# Altium PCB ADCS_BOARDV2.PcbDoc (part 2 of 2)
Units mm, origin at the board's own origin, x right, y up, seen from the top; angles counter-clockwise.
Board outline 92.58 x 92.46 mm, 2 copper layers (Top Layer, Bottom Layer); 139 components, 123 nets, 589 pads, 179 vias.
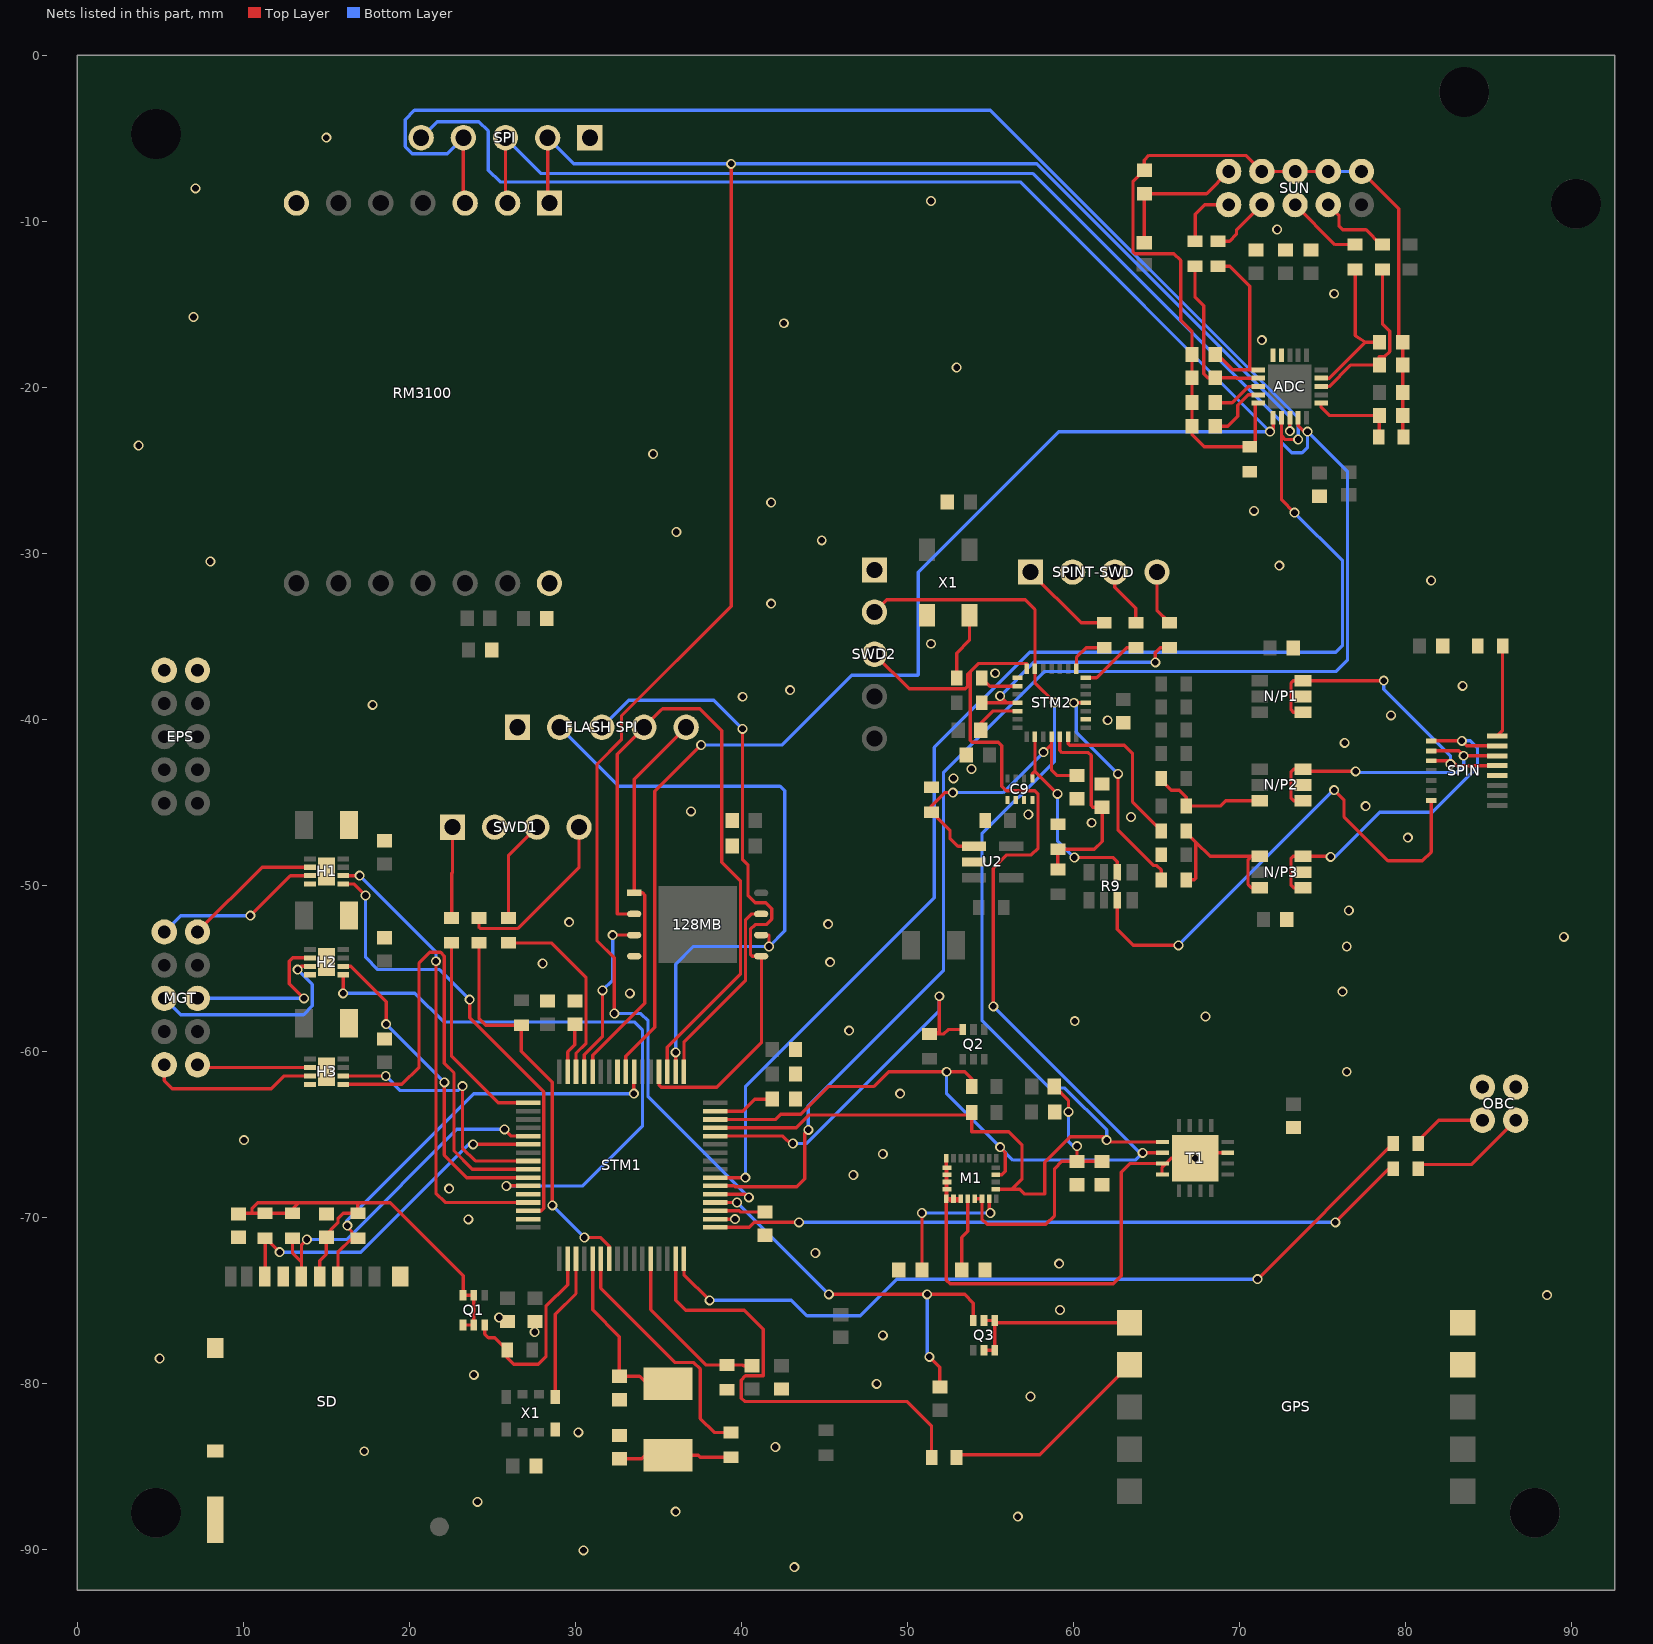
[diagram p2: the nets of this part, all layers, seen from the top]

## Via types
v1: diameter 0.6, hole 0.4, Top Layer to Bottom Layer, 179 vias

## Nets (pads, with @x,y where several pads share a name; then routed paths per layer and width w, separated by ;. In a path a pad name is that pad's centre, name@x,y a point inside that pad or via, vN(x,y) a via of type N, cw(c..) or ccw(c..) an arc to the next point about the centre after c; other vN are vias at no path point) (continued)
BU_R: N/P2.3 R20.1 R21.2 | length 7.1
  Top Layer w0.2: R20.1@65.29,-43.561 65.29,-43.661 65.891,-44.262 66.377,-44.262 66.79,-44.675 R21.2@66.79,-45.212 68.834,-45.212 69.154,-44.892 N/P2.3@71.217,-44.892
C1_SENS: C29.2 M1.24 | length 8.4
  Top Layer w0.2: C29.2@50.865,-73.152 v1(50.865,-69.723) ; M1.24@54.913,-68.861 54.913,-69.645 v1(54.991,-69.723)
  Bottom Layer w0.2: v1(50.865,-69.723) v1(54.991,-69.723)
C7: 
C12: C12.1 STM1.47 | length 3
  Top Layer w0.2: STM1.47@29.528,-61.214 29.528,-60.02 29.96,-59.588 C12.1@29.96,-58.358
C13: C13.2 STM1.19 | length 3
  Top Layer w0.2: STM1.19@38.404,-69.59 39.853,-69.59 39.925,-69.663 C13.2@41.402,-69.663
C16: C16.1 STM1.31 | length 3.7
  Top Layer w0.2: STM1.31@38.404,-63.59 40.067,-63.59 40.792,-62.865 C16.1@41.845,-62.865
C17: 
C23: C23.2 STM1.5 X2.2 | length 10.9
  Top Layer w0.2: STM1.5@31.028,-72.466 31.028,-75.554 32.639,-77.165 C23.2@32.639,-79.564 33.858,-79.564 34.313,-80.019 X2.2@35.56,-80.019
C24: C24.1 R1.1 X2.1 | length 6.9
  Top Layer w0.2: C24.1@32.639,-84.52 33.985,-84.52 34.186,-84.319 X2.1@35.56,-84.319 37.389,-84.319 37.513,-84.443 R1.1@39.37,-84.443
CAP_SENS_21: C30.1 M1.21 | length 4.4
  Top Layer w0.2: C30.1@53.262,-73.152 53.262,-71.196 53.623,-70.835 M1.21@53.623,-68.861
CD: R25.1 STM2.13 | length 9.9
  Top Layer w0.2: STM2.13@59.674,-41.044 59.674,-41.453 59.776,-41.554 63.043,-41.554 63.551,-42.062 63.551,-44.971 R25.1@65.29,-46.711
CD_R: N/P3.1 N/P3.3 R25.2 R27.2 | length 10.5
  Top Layer w0.2: R27.2@66.79,-49.657 67.259,-49.657 67.361,-49.555 67.361,-47.383 ; R25.2@66.79,-46.711 66.79,-46.812 67.361,-47.383 ; N/P3.3@71.217,-50.142 70.714,-50.142 70.51,-49.939 70.51,-48.445 70.714,-48.242 ; N/P3.1@71.217,-48.242 70.714,-48.242 ; 67.361,-47.383 68.22,-48.242 70.714,-48.242
CLKOUT: STM1.3 X1.4@28.78,-80.813 | length 8.9
  Top Layer w0.2: X1.4@28.78,-80.813 28.78,-75.822 30.028,-74.574 STM1.3@30.028,-72.466
Cm: C33.2 R33.1 STM2.11 U2.1 | length 16.5
  Top Layer w0.2: v1(52.73,-44.399) 52.248,-44.399 51.435,-45.212 R33.1@51.435,-45.581 51.462,-45.581 52.553,-46.672 52.553,-47.145 53.035,-47.628 U2.1@54,-47.628 ; v1(58.191,-41.961) 58.674,-41.478 ; STM2.11@58.674,-41.044 58.674,-41.478 ; C33.2@60.198,-43.369 58.979,-43.369 58.674,-43.064 58.674,-41.478
  Bottom Layer w0.2: v1(52.73,-44.399) 55.753,-44.399 v1(58.191,-41.961)
CNV: ADC.11 SPI.5 STM1.40 | length 128.8
  Top Layer w0.2: STM1.40@33.028,-61.214 33.028,-60.274 34.773,-58.53 34.773,-44.323 v1(37.567,-41.529) ; v1(71.831,-22.657) 72.025,-22.463 ADC.11@72.025,-21.831
  Bottom Layer w0.2: SPI.5@20.701,-4.953 21.666,-3.988 24.181,-3.988 24.74,-4.547 24.74,-6.909 25.451,-7.62 56.794,-7.62 v1(71.831,-22.657) 59.106,-22.657 50.648,-31.115 50.648,-37.313 50.622,-37.338 46.634,-37.338 42.443,-41.529 v1(37.567,-41.529)
Cp: C9.8@57.519,-43.546 R9.6 STM2.9 | length 12.1
  Top Layer w0.2: C9.8@57.519,-43.546 57.519,-43.275 57.674,-43.12 ; STM2.9@57.674,-41.044 57.674,-43.12 ; v1(59.03,-44.475) 57.674,-43.12 ; v1(60.046,-48.311) 62.382,-48.311 62.63,-48.558 R9.6@62.63,-49.193
  Bottom Layer w0.2: v1(59.03,-44.475) 59.03,-47.295 v1(60.046,-48.311)
Cp_RE: R9.3 SPIN.1 | length 30.6
  Top Layer w0.2: R9.3@62.63,-50.883 62.63,-52.629 63.602,-53.6 v1(66.319,-53.6) ; v1(75.692,-44.25) 76.293,-44.851 76.293,-45.872 78.934,-48.514 81.005,-48.514 81.539,-47.98 SPIN.1@81.539,-44.881
  Bottom Layer w0.2: v1(66.319,-53.6) v1@75.681,-44.239
CU: R27.1 STM2.18 | length 13.7
  Top Layer w0.2: v1(60.02,-38.989) STM2.18@60.729,-38.989 ; v1(62.672,-43.266) 62.672,-46.645 64.821,-48.793 65.024,-48.793 65.29,-49.059 R27.1@65.29,-49.657
  Bottom Layer w0.2: v1(60.02,-38.989) 60.16,-39.129 60.16,-40.754 v1(62.672,-43.266)
CU_R: R26.1
FM_nCE: 128MB.1 "FLASH SPI.5" STM1.44 | length 23.9
  Top Layer w0.2: STM1.44@31.028,-61.214 31.028,-60.223 34.163,-57.088 34.163,-50.569 34.036,-50.442 128MB.1@33.532,-50.442 33.528,-50.442 33.528,-43.603 36.665,-40.466
FM_nHLD: 128MB.7 STM1.33 | length 11.8
  Top Layer w0.2: STM1.33@36.528,-61.214 36.528,-59.439 40.233,-55.734 40.233,-52.096 40.617,-51.712 128MB.7@41.183,-51.712
FM_nWP: 128MB.3 STM1.45 | length 10.2
  Top Layer w0.2: STM1.45@30.528,-61.214 30.528,-60.198 31.623,-59.103 v1(31.623,-56.312) ; v1(32.233,-52.982) 128MB.3@33.532,-52.982
  Bottom Layer w0.2: v1(31.623,-56.312) 32.233,-55.702 v1(32.233,-52.982)
GND: 128MB.4 "FLASH SPI.1" ADC.4 ADC.5 C1.2 C2.2 C3.2 C4.2 C5.2 C6.2 C7.1 C9.8@56.019,-44.846 C9.8@56.519,-44.846 C9.8@57.019,-44.846 C9.8@57.519,-44.846 C10.1 C11.2 C12.2 C13.1 C14.1 C15.1 C16.2 C17.2 C18.2 C19.2 C20.2 C21.1 C22.1 C23.1 C24.2 C25.2 C26.1 C27.1 C28.1 C29.1 C30.2 C31.1 C32.2 C33.1 C34.1 C35.1 C36.2 C37.2 C39.2 C40.2 C42.2 C43.2 C44.1 C53.2 C54.2 EPS.1 EPS.2 GPS.2@83.439,-76.327 GPS.2@83.439,-78.867 H1.4 H1.9 H2.4 H2.9 H3.4 H3.9 N/P1.5 N/P2.5 N/P3.5 OBC.2 OBC.4 R3.1 R33.2 R35.2 R36.1 R45.1 R48.1 RM3100.1@28.428,-31.79 RM3100.7@13.188,-8.89 SD.6 SD.10 SD.11 SD.12 SD.13 SPI.1 SPIN.11 SPINT-SWD.2 STM1.18 STM1.60 STM1.63 STM2.1 STM2.16 SWD1.2 SWD2.1 U2.2 X1.2@51.176,-33.725 X1.8 | length 1.2
  Top Layer w0.2: STM1.18@38.404,-70.09 v1(39.606,-70.09)
  other v1: 43.18,-91.059 30.48,-90.043 56.642,-88.011 36.028,-87.709 24.094,-87.122 17.272,-84.074 42.037,-83.82 30.172,-82.931 57.404,-80.772 48.133,-80.019 23.876,-79.475 4.953,-78.486 48.514,-77.089 27.534,-76.89 25.4,-76.014 59.182,-75.565 88.519,-74.676 59.133,-72.771 44.45,-72.136 23.545,-70.104 22.387,-68.253 46.736,-67.437 67.32,-66.421 48.514,-66.167 10.033,-65.337 49.554,-62.535 76.454,-61.214 46.482,-58.739 60.071,-58.166 67.945,-57.885 33.274,-56.49 76.2,-56.388 28.018,-54.692 45.339,-54.61 76.454,-53.67 89.535,-53.086 45.212,-52.324 29.613,-52.201 76.581,-51.499 80.137,-47.117 61.087,-46.217 63.457,-45.872 57.278,-45.716 36.957,-45.53 77.597,-45.212 52.767,-43.546 53.848,-42.978 76.327,-41.402 62.049,-40.043 79.121,-39.751 17.78,-39.116 40.067,-38.627 42.926,-38.227 83.439,-37.973 55.273,-37.211 51.409,-35.433 41.783,-33.02 81.534,-31.623 72.39,-30.734 8.001,-30.48 44.831,-29.21 36.068,-28.702 70.866,-27.432 41.783,-26.924 34.671,-24.003 3.683,-23.495 52.959,-18.796 71.342,-17.145 42.545,-16.129 6.985,-15.748 75.692,-14.351 72.263,-10.485 51.409,-8.763 7.112,-8.001 14.986,-4.953
GND_SEN: M1.13 M1.14 M1.15 M1.16 M1.17 M1.18 M1.19 M1.20 T1.3 T1.4 T1.11 T1.17 | length 35.8
  Top Layer w0.2: M1.13@52.333,-66.421 M1.14@52.333,-66.996 ; T1.4@65.352,-67.396 65.329,-67.396 65.329,-66.98 65.352,-66.957 ; T1.11@69.289,-66.096 67.645,-66.096 T1.17@67.32,-66.421 65.888,-66.421 65.352,-66.957 ; M1.18@52.333,-68.861 M1.14@52.333,-66.996 ; M1.18@52.333,-68.861 52.333,-73.762 52.562,-73.99 62.382,-73.99 62.865,-73.508 62.865,-67.259 63.378,-66.746 T1.3@65.352,-66.746 65.352,-66.957 ; M1.18@52.333,-68.861 M1.18@52.453,-68.861 ; M1.14@52.333,-66.996 M1.14@52.368,-66.996 M1.15@52.368,-67.426 M1.16@52.368,-67.856 M1.17@52.368,-68.286 52.368,-68.776 M1.18@52.453,-68.861 ; M1.18@52.453,-68.861 M1.19@52.763,-68.861 M1.20@53.193,-68.861 53.193,-68.986 52.578,-68.986 M1.18@52.453,-68.861
GPS_EN: C38.2 Q3.3 STM1.20 | length 25
  Top Layer w0.2: STM1.20@38.404,-69.09 v1(39.726,-69.09) ; v1(45.261,-74.625) v1(51.181,-74.625) 53.442,-74.625 53.962,-75.146 Q3.3@53.962,-76.2 ; v1(51.308,-78.384) 51.943,-79.019 C38.2@51.943,-80.199
  Bottom Layer w0.2: v1(39.726,-69.09) v1(45.261,-74.625) ; v1(51.181,-74.625) 51.181,-78.257 v1(51.308,-78.384)
GPS_ENPIN: GPS.2@63.373,-76.327 Q3.1 Q3.2 Q3.4 Q3.5 | length 11.3
  Top Layer w0.2: Q3.5@54.61,-77.99 Q3.4@55.258,-77.99 Q3.1@55.258,-76.327 ; Q3.2@54.61,-76.327 Q3.2@54.61,-76.2 Q3.1@55.258,-76.2 Q3.1@55.258,-76.327 ; GPS.2@63.373,-76.327 Q3.1@55.258,-76.327
GPS_RX: GPS.2@63.373,-78.867 R39.2 | length 12.8
  Top Layer w0.2: R39.2@52.947,-84.455 52.947,-84.277 57.963,-84.277 GPS.2@63.373,-78.867
IN6: ADC.8 C51.2 | length 3
  Top Layer w0.2: C51.2@68.534,-20.914 69.545,-20.914 70.52,-19.939 ADC.8@71.133,-19.939
IN7: ADC.9 C52.2 | length 3.8
  Top Layer w0.2: C52.2@68.534,-22.331 69.291,-22.331 69.88,-21.743 69.88,-21.07 70.51,-20.439 ADC.9@71.133,-20.439
L_ST: R31.1 X1.3@53.726,-33.725 | length 4.1
  Top Layer w0.2: R31.1@52.971,-37.496 52.971,-35.992 53.726,-35.237 X1.3@53.726,-33.725
MISO: ADC.14 RM3100.2@25.908,-8.89 SPI.3 STM1.22 | length 138.7
  Top Layer w0.2: SPI.3@25.781,-4.953 25.781,-8.763 RM3100.2@25.908,-8.89 ; STM1.22@38.404,-68.09 39.548,-68.09 39.606,-68.148 43.332,-68.148 43.815,-67.666 43.815,-64.922 v1(44.019,-64.718) v1@44.019,-64.614 ; ADC.14@73.525,-21.831 73.525,-22.293 73.889,-22.657 v1(74.092,-22.657)
  Bottom Layer w0.2: SPI.3@25.781,-4.953 27.94,-7.112 57.556,-7.112 72.525,-22.081 72.525,-23.325 73.127,-23.927 73.762,-23.927 74.092,-23.597 v1(74.092,-22.657) 76.505,-25.07 76.505,-36.398 75.794,-37.109 58.242,-37.109 52.161,-43.191 52.161,-55.13 44.019,-63.272 v1(44.019,-64.718)
MISO2: 128MB.2 "FLASH SPI.4" STM1.35 | length 41.5
  Top Layer w0.2: 128MB.2@33.532,-51.712 32.512,-51.712 32.512,-42.079 34.125,-40.466 35.173,-39.419 35.247,-39.345 37.49,-39.345 38.811,-40.665 38.811,-48.586 39.933,-49.708 39.933,-55.336 35.528,-59.741 STM1.35@35.528,-61.214
MOSI: ADC.12 RM3100.3@23.348,-8.89 SPI.4 STM1.23 | length 148.6
  Top Layer w0.2: SPI.4@23.241,-4.953 23.241,-8.783 RM3100.3@23.348,-8.89 ; STM1.23@38.404,-67.59 v1(40.234,-67.59) ; ADC.12@72.525,-21.831 72.525,-22.462 72.525,-22.911 ; v1(73.304,-27.534) 72.525,-26.754 72.525,-22.911 ; v1(73.525,-23.131) 72.746,-23.131 72.525,-22.911
  Bottom Layer w0.2: SPI.4@23.241,-4.953 22.276,-5.918 20.168,-5.918 19.736,-5.486 19.736,-3.861 20.295,-3.302 54.991,-3.302 73.525,-21.836 v1(73.525,-23.131) ; v1(40.234,-67.59) 40.234,-62.126 51.613,-50.747 51.613,-41.678 57.35,-35.941 75.794,-35.941 76.2,-35.535 76.2,-30.429 v1(73.304,-27.534)
MOSI2: 128MB.5 "FLASH SPI.3" STM1.36 | length 39.5
  Top Layer w0.2: STM1.36@35.028,-61.214 35.028,-62.028 35.154,-62.154 38.506,-62.154 41.199,-59.461 41.199,-54.252 128MB.5@41.183,-54.252 40.64,-54.252 40.538,-54.15 40.538,-52.629 40.818,-52.349 41.484,-52.349 41.814,-52.019 41.814,-51.39 41.453,-51.029 40.818,-51.029 40.386,-50.597 40.386,-48.743 40.056,-48.412 v1(40.056,-40.564)
  Bottom Layer w0.2: 31.585,-40.466 33.215,-38.837 38.329,-38.837 v1(40.056,-40.564)
MTx1: H1.6 STM1.61 | length 27.8
  Top Layer w0.2: H1.6@16.003,-49.403 v1(16.993,-49.403) ; v1(21.59,-54.559) 21.59,-68.531 22.149,-69.09 STM1.61@27.152,-69.09
  Bottom Layer w0.2: v1(16.993,-49.403) 21.59,-54 v1(21.59,-54.559)
MTx2: H1.5 STM1.62 | length 28.1
  Top Layer w0.2: H1.5@16.003,-49.911 16.662,-49.911 v1(17.35,-50.599) ; v1(23.622,-56.871) 23.622,-57.963 28.092,-62.433 28.092,-69.438 27.94,-69.59 STM1.62@27.152,-69.59
  Bottom Layer w0.2: v1(17.35,-50.599) 17.35,-54.325 18.085,-55.059 21.811,-55.059 v1(23.622,-56.871)
MTy1: H2.6 STM1.58 | length 19.8
  Top Layer w0.2: H2.6@16.003,-54.864 16.459,-54.864 18.593,-56.998 v1(18.593,-58.344) ; v1(22.098,-61.849) 22.098,-66.233 23.455,-67.59 STM1.58@27.152,-67.59
  Bottom Layer w0.2: v1(18.593,-58.344) v1(22.098,-61.849)
MTy2: H2.5 STM1.59 | length 36.9
  Top Layer w0.2: v1(16.002,-56.49) 16.002,-55.372 H2.5@16.003,-55.372 ; v1(25.832,-68.097) 25.839,-68.09 STM1.59@27.152,-68.09
  Bottom Layer w0.2: v1(16.002,-56.49) 20.32,-56.49 22.047,-58.217 33.528,-58.217 34.036,-58.725 34.036,-64.465 30.404,-68.097 v1(25.832,-68.097)
MTz1: H3.6 STM1.56 | length 15.7
  Top Layer w0.2: H3.6@16.003,-61.468 v1(18.567,-61.468) ; v1(23.19,-62.078) 23.19,-65.811 23.969,-66.59 STM1.56@27.152,-66.59
  Bottom Layer w0.2: v1(18.567,-61.468) 19.448,-62.349 22.919,-62.349 v1(23.19,-62.078)
MTz2: H3.5 STM1.57 | length 30.1
  Top Layer w0.2: H3.5@16.003,-61.976 19.533,-61.976 20.574,-60.935 20.574,-54.661 21.209,-54.026 21.869,-54.026 22.098,-54.254 22.098,-60.706 22.679,-61.287 22.679,-65.983 23.786,-67.09 STM1.57@27.152,-67.09
nRST: R2.1 R22.1 STM1.7 | length 24.1
  Top Layer w0.2: R22.1@24.186,-53.455 24.181,-53.455 24.181,-58.002 24.587,-58.408 R2.1@26.734,-58.408 26.734,-59.982 28.6,-61.849 v1(28.6,-69.266) ; v1(30.531,-71.196) 31.496,-71.196 32.028,-71.728 STM1.7@32.028,-72.466
  Bottom Layer w0.2: v1(28.6,-69.266) v1(30.531,-71.196)
nRST_R: R22.2 SWD1.4 | length 10.6
  Top Layer w0.2: R22.2@24.186,-51.955 24.181,-51.955 24.181,-52.502 24.261,-52.582 26.539,-52.582 30.211,-48.91 SWD1.4@30.211,-46.482
NRST_S: R28.1 R32.2 STM2.4 | length 14.5
  Top Layer w0.2: R32.2@54.471,-38.989 55.982,-38.989 ; v1(55.575,-38.583) 55.982,-38.989 ; STM2.4@56.619,-38.989 55.982,-38.989 ; v1(64.922,-36.551) 64.922,-35.966 65.214,-35.675 R28.1@65.786,-35.675
  Bottom Layer w0.2: v1(55.575,-38.583) 57.607,-36.551 v1(64.922,-36.551)
OBC_RX: OBC.3 R38.2 | length 7.2
  Top Layer w0.2: R38.2@80.76,-67.056 80.76,-66.802 83.963,-66.802 OBC.3@86.63,-64.135
OBC_TX: OBC.1 R37.2 | length 4.5
  Top Layer w0.2: R37.2@80.76,-65.532 80.76,-65.372 81.997,-64.135 OBC.1@84.63,-64.135
OUTX_1: H1.2 MGT.1 | length 8.4
  Top Layer w0.2: MGT.1@7.228,-52.795 11.127,-48.895 H1.2@13.997,-48.895
OUTX_2: H1.3 MGT.2 | length 10.2
  Top Layer w0.2: v1(10.414,-51.816) 12.827,-49.403 H1.3@13.997,-49.403
  Bottom Layer w0.2: MGT.2@5.228,-52.795 6.206,-51.816 v1(10.414,-51.816)
OUTY_1: H2.2 MGT.5 | length 10.3
  Top Layer w0.2: v1(13.64,-56.795) 12.759,-55.914 12.759,-54.567 12.97,-54.356 H2.2@13.997,-54.356
  Bottom Layer w0.2: MGT.5@7.228,-56.795 v1(13.64,-56.795)
OUTY_2: H2.3 MGT.6 | length 12.9
  Top Layer w0.2: v1(13.259,-55.067) 13.462,-54.864 H2.3@13.997,-54.864
  Bottom Layer w0.2: MGT.6@5.228,-56.795 6.218,-57.785 13.614,-57.785 14.148,-57.252 14.148,-55.956 v1(13.259,-55.067)
OUTZ_1: H3.2 MGT.9 | length 6.8
  Top Layer w0.2: MGT.9@7.228,-60.795 7.393,-60.96 H3.2@13.997,-60.96
OUTZ_2: H3.3 MGT.10 | length 10.2
  Top Layer w0.2: MGT.10@5.228,-60.795 5.228,-61.743 5.715,-62.23 11.684,-62.23 12.446,-61.468 H3.3@13.997,-61.468
PF0: R31.2 STM2.2 | length 2.4
  Top Layer w0.2: R31.2@54.471,-37.496 54.964,-37.989 STM2.2@56.619,-37.989
PhA: N/P1.4 N/P1.6 SPIN.5 SPIN.12 | length 18.8
  Top Layer w0.2: N/P1.4@73.817,-39.558 73.238,-39.558 73.101,-39.421 73.101,-37.795 73.238,-37.658 N/P1.6@73.817,-37.658 v1(78.683,-37.658) ; SPIN.5@81.539,-42.481 82.791,-42.481 83.091,-42.781 SPIN.12@85.514,-42.781
  Bottom Layer w0.2: v1(78.683,-37.658) 78.683,-38.183 82.706,-42.206 v1(82.706,-42.685)
PhB: N/P2.4 N/P2.6 SPIN.6 SPIN.13 | length 17.8
  Top Layer w0.2: N/P2.4@73.817,-44.892 73.254,-44.892 73.101,-44.74 73.101,-43.144 73.254,-42.992 N/P2.6@73.817,-42.992 73.945,-43.12 v1(76.989,-43.12) ; SPIN.6@81.539,-41.881 83.198,-41.881 v1(83.498,-42.181) SPIN.13@85.514,-42.181
  Bottom Layer w0.2: v1(76.989,-43.12) 77.054,-43.185 83.09,-43.185 83.498,-42.777 v1(83.498,-42.181)
PhC: N/P3.4 N/P3.6 SPIN.7 SPIN.14 | length 22.3
  Top Layer w0.2: N/P3.4@73.817,-50.142 73.254,-50.142 73.101,-49.99 73.101,-48.362 73.221,-48.242 N/P3.6@73.817,-48.242 75.458,-48.242 v1(75.488,-48.273) ; SPIN.7@81.539,-41.281 v1(83.392,-41.281) 83.692,-41.581 SPIN.14@85.514,-41.581
  Bottom Layer w0.2: v1(75.488,-48.273) 75.772,-48.273 78.452,-45.593 81.618,-45.593 84.328,-42.883 84.328,-41.706 83.903,-41.281 v1(83.392,-41.281)
R1: R1.2 STM1.6 | length 15
  Top Layer w0.2: STM1.6@31.528,-72.466 31.528,-74.244 36.015,-78.731 37.128,-78.731 37.513,-79.116 37.513,-82.107 38.349,-82.943 R1.2@39.37,-82.943
R37: R37.1 STM1.16 | length 49
  Top Layer w0.2: STM1.16@36.528,-72.466 36.528,-73.434 v1(38.075,-74.981) ; v1(71.081,-73.711) R37.1@79.26,-65.532
  Bottom Layer w0.2: v1(38.075,-74.981) 43.002,-74.981 43.942,-75.921 47.142,-75.921 49.352,-73.711 v1(71.081,-73.711)
R38: R38.1 STM1.17 | length 42.7
  Top Layer w0.2: STM1.17@38.404,-70.59 40.459,-70.59 40.767,-70.282 v1(43.459,-70.282) ; v1(75.768,-70.282) 79.26,-66.79 R38.1@79.26,-67.056
  Bottom Layer w0.2: v1(43.459,-70.282) v1(75.768,-70.282)
R39: R39.1 STM1.15 | length 27.9
  Top Layer w0.2: STM1.15@36.028,-72.466 36.028,-74.981 36.638,-75.59 40.157,-75.59 41.3,-76.733 41.3,-79.529 40.234,-79.529 39.98,-79.783 39.98,-80.874 40.183,-81.077 49.948,-81.077 51.447,-82.575 R39.1@51.447,-84.455
RM_CS: STM1.41
RST_ST: R28.2 SPINT-SWD.4 | length 3.4
  Top Layer w0.2: SPINT-SWD.4@65.024,-31.115 65.024,-33.413 R28.2@65.786,-34.175
SCL: M1.2 R15.1 STM1.29 STM2.27 SWD2.2 T1.1 | length 84.2
  Top Layer w0.2: STM1.29@38.404,-64.59 43.306,-64.59 44.081,-63.815 53.723,-63.815 R15.1@53.86,-63.678 ; SWD2.2@48.006,-33.528 48.743,-32.791 57.099,-32.791 57.674,-33.366 STM2.27@57.674,-36.934 57.674,-37.795 v1(58.852,-38.973) ; R15.1@53.86,-63.659 R15.1@53.86,-63.678 ; M1.2@55.308,-68.286 56.269,-68.286 ; T1.1@65.352,-65.446 62.101,-65.446 v1(61.992,-65.337) 61.788,-65.133 59.799,-65.133 58.255,-66.677 58.255,-68.58 57.046,-68.58 56.752,-68.286 56.269,-68.286 ; R15.1@53.86,-63.678 53.86,-64.821 56.089,-64.821 56.896,-65.627 56.896,-67.659 56.269,-68.286
  Bottom Layer w0.2: v1(58.852,-38.973) 58.852,-42.52 54.483,-46.888 54.483,-58.115 58.565,-62.197 59.47,-62.197 61.992,-64.719 v1(61.992,-65.337)
SCLK: ADC.13 RM3100.1@28.428,-8.89 SPI.2 STM1.21 | length 129.8
  Top Layer w0.2: SPI.2@28.321,-4.953 28.321,-8.783 RM3100.1@28.428,-8.89 ; v1(32.334,-57.709) 32.334,-54.356 31.293,-53.315 31.293,-42.683 32.766,-41.209 32.766,-39.786 39.37,-33.182 v1(39.37,-6.528) ; STM1.21@38.404,-68.59 39.226,-68.588 40.242,-68.588 v1(40.437,-68.783) ; v1(73.025,-22.631) ADC.13@73.025,-21.831
  Bottom Layer w0.2: SPI.2@28.321,-4.953 29.896,-6.528 v1(39.37,-6.528) 57.785,-6.528 73.025,-21.768 v1(73.025,-22.631) ; v1(32.334,-57.709) 33.934,-57.709 34.366,-58.141 34.366,-62.713 v1(40.437,-68.783)
SCLK2: 128MB.6 "FLASH SPI.2" STM1.34 | length 38.6
  Top Layer w0.2: STM1.34@36.028,-61.214 v1(36.028,-60.046) ; 128MB.6@41.183,-52.982 41.656,-52.982 v1(41.656,-53.67)
  Bottom Layer w0.2: 29.045,-40.466 32.597,-44.018 42.316,-44.018 42.596,-44.298 42.596,-52.73 v1(41.656,-53.67) 37.084,-53.67 36.028,-54.726 v1(36.028,-60.046)
SD_CLK: R11.1 SD.5 STM1.53 | length 20.3
  Top Layer w0.2: R11.1@12.954,-71.235 12.954,-72.135 13.488,-72.669 ; SD.5@13.488,-73.559 13.488,-72.669 ; v1(13.818,-71.323) 13.488,-71.653 13.488,-72.669 ; v1(25.72,-64.684) 26.126,-65.09 STM1.53@27.152,-65.09
  Bottom Layer w0.2: v1(13.818,-71.323) 16.205,-71.323 22.845,-64.684 v1(25.72,-64.684)
SD_CMD: R13.1 SD.7 STM1.54 | length 21.2
  Top Layer w0.2: SD.7@11.288,-73.559 11.288,-73.04 11.303,-73.025 R13.1@11.303,-71.235 11.328,-71.235 v1(12.179,-72.085) ; v1(23.834,-65.59) STM1.54@27.152,-65.59
  Bottom Layer w0.2: v1(12.179,-72.085) 17.069,-72.085 23.564,-65.59 v1(23.834,-65.59)
SD_DO: R12.1 SD.3 STM1.39 | length 26
  Top Layer w0.2: SD.3@15.688,-73.559 15.688,-72.082 R12.1@16.535,-71.235 ; v1(16.256,-70.485) 16.256,-70.587 16.535,-70.866 R12.1@16.535,-71.235 ; R12.1@16.891,-71.235 R12.1@16.535,-71.235 ; v1(33.51,-62.535) 33.51,-61.232 STM1.39@33.528,-61.214
  Bottom Layer w0.2: v1(16.256,-70.485) 16.256,-70.231 16.212,-70.187 23.865,-62.535 v1(33.51,-62.535)
SD_EN: Q1.3 R10.1 STM1.2 | length 11.9
  Top Layer w0.2: Q1.3@24.524,-76.466 24.524,-77.013 24.753,-77.241 25.146,-77.241 R10.1@25.882,-77.978 ; R10.1@25.882,-77.978 25.882,-78.435 26.274,-78.827 27.769,-78.827 28.219,-78.376 28.219,-75.35 29.528,-74.041 STM1.2@29.528,-72.466
SD_VCC: C14.2 C19.1 Q1.1 Q1.2 Q1.4 Q1.5 R11.2 R12.2 R13.2 SD.4 | length 29.5
  Top Layer w0.2: C14.2@9.688,-69.785 9.738,-69.735 10.516,-69.735 ; R11.2@12.954,-69.735 R11.2@12.713,-69.735 ; SD.4@14.588,-73.559 14.588,-72.593 14.986,-72.195 C19.1@14.986,-71.185 14.819,-71.185 15.689,-70.316 15.689,-70.063 16.017,-69.735 R12.2@16.891,-69.735 16.891,-69.113 ; Q1.1@23.228,-76.466 Q1.2@23.876,-76.466 Q1.5@23.876,-74.676 Q1.4@23.228,-74.676 23.228,-73.507 18.834,-69.113 16.891,-69.113 ; 10.516,-69.735 R13.2@11.303,-69.735 R11.2@12.713,-69.735 ; 10.516,-69.735 10.516,-69.444 10.846,-69.113 13.335,-69.113 ; R11.2@12.713,-69.735 13.335,-69.113 ; 13.335,-69.113 16.891,-69.113
SDA: M1.4 R14.1 STM1.30 STM2.28 SWD2.3 T1.2 | length 85.5
  Top Layer w0.2: STM1.30@38.404,-64.09 42.062,-64.09 42.369,-63.783 43.559,-63.783 45.239,-62.103 47.981,-62.103 48.87,-61.214 v1(52.349,-61.214) 53.442,-61.214 53.86,-61.632 R14.1@53.86,-62.103 ; SWD2.3@48.006,-36.068 50.089,-38.151 53.467,-38.151 53.619,-37.998 53.619,-37.262 53.772,-37.109 ; v1(55.169,-57.277) 55.169,-48.971 55.982,-48.158 57.455,-48.158 57.861,-47.752 57.861,-44.501 57.656,-44.296 55.955,-44.296 55.677,-44.018 55.677,-41.58 55.474,-41.377 53.899,-41.377 53.772,-41.25 53.772,-37.109 ; M1.4@55.308,-67.426 55.677,-67.426 55.893,-67.209 55.893,-66.079 v1(55.575,-65.761) ; STM2.28@57.174,-36.934 57.174,-36.627 54.254,-36.627 53.772,-37.109 ; v1@63.988,-66.096 v1(64.16,-66.096) T1.2@65.352,-66.096
  Bottom Layer w0.2: v1(52.349,-61.214) 52.349,-62.535 v1(55.575,-65.761) 56.346,-66.531 63.725,-66.531 v1(64.16,-66.096) ; v1(55.169,-57.277) v1@63.988,-66.096
SENS_EN: Q2.3 R9.2@51.308,-58.94 STM1.28 | length 22.7
  Top Layer w0.2: STM1.28@38.404,-65.09 42.491,-65.09 v1@43.013,-65.612 ; v1(51.918,-56.667) 51.918,-58.838 R9.2@51.308,-58.94 52.172,-58.94 52.438,-58.674 Q2.3@53.327,-58.674
  Bottom Layer w0.2: v1(43.089,-65.537) 43.907,-65.537 51.918,-57.527 v1(51.918,-56.667)
SENS_VDD: C26.2 C27.2 L2.2 M1.22 M1.23 | length 17.8
  Top Layer w0.2: M1.22@54.053,-68.861 M1.23@54.483,-68.861 54.483,-70.104 54.788,-70.409 58.318,-70.409 58.852,-69.875 58.852,-67.056 59.293,-66.615 C26.2@60.198,-66.615 C26.2@60.577,-66.615 ; L2.2@58.839,-62.103 58.852,-62.103 59.69,-62.941 v1(59.69,-63.627) ; C26.2@60.202,-66.424 v1(60.202,-65.693) ; C26.2@60.386,-66.424 60.577,-66.612 C26.2@60.577,-66.615 ; C27.2@61.722,-66.615 C26.2@60.577,-66.615
  Bottom Layer w0.2: v1(59.69,-63.627) 59.69,-65.405 60.173,-65.888 60.202,-65.859 v1(60.202,-65.693)
SETC: 
SETP: 
SP: R48.2 SPIN.15 | length 5.6
  Top Layer w0.2: SPIN.15@85.514,-40.981 85.84,-40.656 R48.2@85.84,-35.56
SS1: ADC.7 C50.2 R41.1 | length 10.1
  Top Layer w0.2: R41.1@67.31,-12.688 67.31,-14.529 67.843,-15.062 67.843,-19.182 68.072,-19.41 C50.2@68.534,-19.41 69.799,-19.41 69.828,-19.439 ADC.7@71.133,-19.439
SS1_R: R41.2 SUN.2 | length 3.9
  Top Layer w0.2: R41.2@67.31,-11.188 67.335,-11.188 67.335,-9.55 67.901,-8.985 SUN.2@69.342,-8.985
SS2: ADC.6 C49.2 R40.1 | length 10.4
  Top Layer w0.2: C49.2@68.534,-18.001 68.648,-18.001 69.587,-18.939 70.619,-18.939 ; R40.1@68.707,-12.688 69.406,-12.688 70.619,-13.9 70.619,-18.939 ; ADC.6@71.133,-18.939 70.619,-18.939
SS2_R: R40.2 SUN.4 | length 3.7
  Top Layer w0.2: R40.2@68.707,-11.188 69.393,-11.188 69.811,-10.77 69.811,-10.516 SUN.4@71.342,-8.985
SS3: ADC.19 C45.1 R42.1 | length 9.1
  Top Layer w0.2: ADC.19@74.917,-19.439 75.405,-19.439 77.572,-17.272 ; R42.1@76.962,-12.888 76.962,-16.866 77.572,-17.272 ; C45.1@78.421,-17.272 77.572,-17.272
SS3_R: R42.2 SUN.6 | length 4.6
  Top Layer w0.2: SUN.6@73.342,-8.985 75.745,-11.388 R42.2@76.962,-11.388
SS4: ADC.18 C46.1 R43.1 | length 10.4
  Top Layer w0.2: ADC.18@74.917,-19.939 75.387,-19.939 76.678,-18.648 C46.1@78.421,-18.648 78.421,-18.15 78.726,-18.15 79.045,-17.831 79.045,-16.612 78.613,-16.18 R43.1@78.613,-12.888
SS4_R: R43.2 SUN.8 | length 4.6
  Top Layer w0.2: SUN.8@75.342,-8.985 75.985,-9.628 75.985,-10.257 76.221,-10.493 77.616,-10.493 78.511,-11.388 R43.2@78.613,-11.388
SU_TH_GO: ADC.16 C48.1 R46.1 | length 5.1
  Top Layer w0.2: ADC.16@74.917,-20.939 74.905,-20.939 74.905,-21.201 75.387,-21.684 C48.1@78.421,-21.684 R46.1@78.421,-22.76
SU_TH_RET: 
SUN_GND: ADC.10 C41.2 C45.2 C46.2 C47.2 C48.2 C49.1 C50.1 C51.1 C52.1 R45.2 R46.2 SUN.3 SUN.5 SUN.7 SUN.9 | length 61.4
  Top Layer w0.2: ADC.10@71.133,-20.939 70.942,-20.939 70.934,-23.574 R45.2@70.612,-23.574 67.867,-23.574 67.134,-22.841 C52.1@67.134,-22.331 C51.1@67.134,-20.914 C50.1@67.134,-19.41 C49.1@67.134,-18.001 67.134,-16.639 66.446,-15.951 66.446,-12.344 66.04,-11.938 63.703,-11.938 63.576,-11.811 63.576,-7.606 C41.2@64.262,-6.92 64.262,-6.299 64.541,-6.02 70.377,-6.02 SUN.3@71.342,-6.985 SUN.5@73.342,-6.985 SUN.7@75.342,-6.985 ; SUN.9@77.342,-6.985 79.578,-9.221 79.578,-17.272 C45.2@79.821,-17.272 C46.2@79.821,-18.648 C47.2@79.821,-20.299 C48.2@79.821,-21.684 79.821,-22.937 R46.2@79.871,-22.987
  Bottom Layer w0.2: SUN.3@71.342,-6.985 SUN.5@73.342,-6.985 SUN.7@75.342,-6.985 SUN.9@77.342,-6.985
SUN_P2: C41.1 L1.2 SUN.1 | length 8.6
  Top Layer w0.2: L1.2@64.262,-11.265 C41.1@64.262,-8.32 68.007,-8.32 SUN.1@69.342,-6.985
SWCLK: R24.1 STM1.49 | length 12.6
  Top Layer w0.2: R24.1@22.535,-53.455 22.53,-53.455 22.53,-60.288 25.332,-63.09 STM1.49@27.152,-63.09
SWCLK_R: R24.2 SWD1.1 | length 5.5
  Top Layer w0.2: R24.2@22.535,-51.955 22.535,-49.251 22.591,-49.194 SWD1.1@22.591,-46.482
SWCLK_RS: R30.2 SPINT-SWD.1 | length 5.7
  Top Layer w0.2: SPINT-SWD.1@57.404,-31.115 60.464,-34.175 R30.2@61.849,-34.175
SWCLK_S: R30.1 STM2.22 | length 2.6
  Top Layer w0.2: STM2.22@60.174,-36.934 60.174,-36.258 60.757,-35.675 R30.1@61.849,-35.675
SWDIO: R23.1 STM1.46 | length 11.5
  Top Layer w0.2: R23.1@25.964,-53.455 28.538,-53.455 30.632,-55.55 30.632,-59.492 30.028,-60.096 STM1.46@30.028,-61.214
SWDIO_R: R23.2 SWD1.3 | length 6.2
  Top Layer w0.2: R23.2@25.964,-51.955 25.959,-51.955 25.959,-48.194 SWD1.3@27.671,-46.482
SWDIO_RS: R29.2 SPINT-SWD.3 | length 3.6
  Top Layer w0.2: SPINT-SWD.3@62.484,-31.115 62.484,-32.029 63.754,-33.299 R29.2@63.754,-34.175
SWDIO_S: R29.1 STM2.21 | length 3.8
  Top Layer w0.2: STM2.21@60.729,-37.489 61.381,-37.489 63.195,-35.675 R29.1@63.754,-35.675
VDDA: L3.2 STM2.5 | length 3
  Top Layer w0.2: L3.2@54.394,-40.64 54.394,-40.213 55.118,-39.489 STM2.5@56.619,-39.489
Vm: C32.1 R34.2 R35.1 STM2.12 | length 12.7
  Top Layer w0.2: R34.2@59.055,-49.034 R35.1@59.055,-47.811 61.257,-47.811 61.722,-47.346 C32.1@61.722,-45.277 61.163,-45.277 61.062,-45.175 61.062,-42.164 60.884,-41.986 59.301,-41.986 59.174,-41.859 STM2.12@59.174,-41.044
VSS_GND: C8.2 R3.2 STM1.12 | length 10.6
  Top Layer w0.2: STM1.12@34.528,-72.466 34.528,-75.537 37.87,-78.879 R3.2@39.116,-78.879 40.066,-78.879 40.116,-78.929 C8.2@40.64,-78.929
pads on no net: 128MB.9 ADC.21 C31.2 Designator1.1 Designator1.2 Designator1.3 Designator1.4 Designator1.5 EPS.7 EPS.8 EPS.9 EPS.10 GPS.2@63.373,-81.407 GPS.2@63.373,-83.947 GPS.2@63.373,-86.487 GPS.2@83.439,-81.407 GPS.2@83.439,-83.947 GPS.2@83.439,-86.487 M1.9 M1.10 M1.11 M1.12 MGT.3 MGT.4 MGT.7 MGT.8 R6.1 R6.2 RM3100.4 RM3100.5 RM3100.6 RM3100.7@13.188,-31.79 SD.1 SD.2 SD.8 SD.9 SD.14 SPIN.8 SPIN.9 STM1.4 STM1.8 STM1.9 STM1.10 STM1.11 STM1.14 STM1.24 STM1.25 STM1.26 STM1.27 STM1.37 STM1.38 STM1.42 STM1.43 STM1.50 STM1.51 STM1.52 STM1.55 STM2.3 STM2.10 STM2.23 STM2.24 STM2.25 STM2.26 T1.5 T1.6 T1.7 T1.8 T1.9 T1.10 T1.13 T1.14 T1.15 T1.16 X1.1@51.176,-29.775 X1.2@26.805,-80.638 X1.3@27.805,-80.638 X1.6 X1.7

## Polygon pours and split planes (outlines as drawn)
GND on Top Layer "GND_L01_P001" (solid, pour order 1): 0,-92.456 92.583,-92.456 92.583,0 0,0
GND on Bottom Layer "GND_L02_P002" (solid, pour order 2): 0,-92.456 92.583,-92.456 92.583,0 0,0

## Keep-outs
Top Layer:
  rectangle: 52.733,-68.496 54.943,-66.786

## Silkscreen, mask and mechanical layers (free items; w line width, h text height)
Top Overlay:
  drawing of 902 lines, arcs and shapes, not listed
  text "ADCS" at 38.227,-11.176 h10
  text "MISO" at 34.544,-38.773 h0.8 r90
  text "MOSI" at 32.004,-38.822 h0.8 r90
  text "nCE" at 37.084,-38.822 h0.8 r90
  text "GND" at 26.797,-38.9 h0.8 r90
  text "SCLK" at 29.464,-38.893 h0.8 r90
  text "." at 24.765,-83.566 h1.52

## Text inside footprints (layer, text, board x,y; h text height)
ADC: Mechanical 13 "*" at 73.64,-18.136 h1.27 r270
STM1: Mechanical 13 "*" at 29.413,-71.831 h1.27 r90
T1: Mechanical 13 "*" at 65.415,-65.756 h1.27
U2: Mechanical 13 "*" at 54.178,-48.161 h1.27